# Altium PCB PCB1.PcbDoc
Units mil, origin at the board's own origin, x right, y up, seen from the top; angles counter-clockwise.
Board outline 2874.02 x 4055.12 mil, 2 copper layers (Top Layer, Bottom Layer); 31 components, 20 nets, 108 pads, 5 vias.
Unrouted connection lines stored in the file: 66.
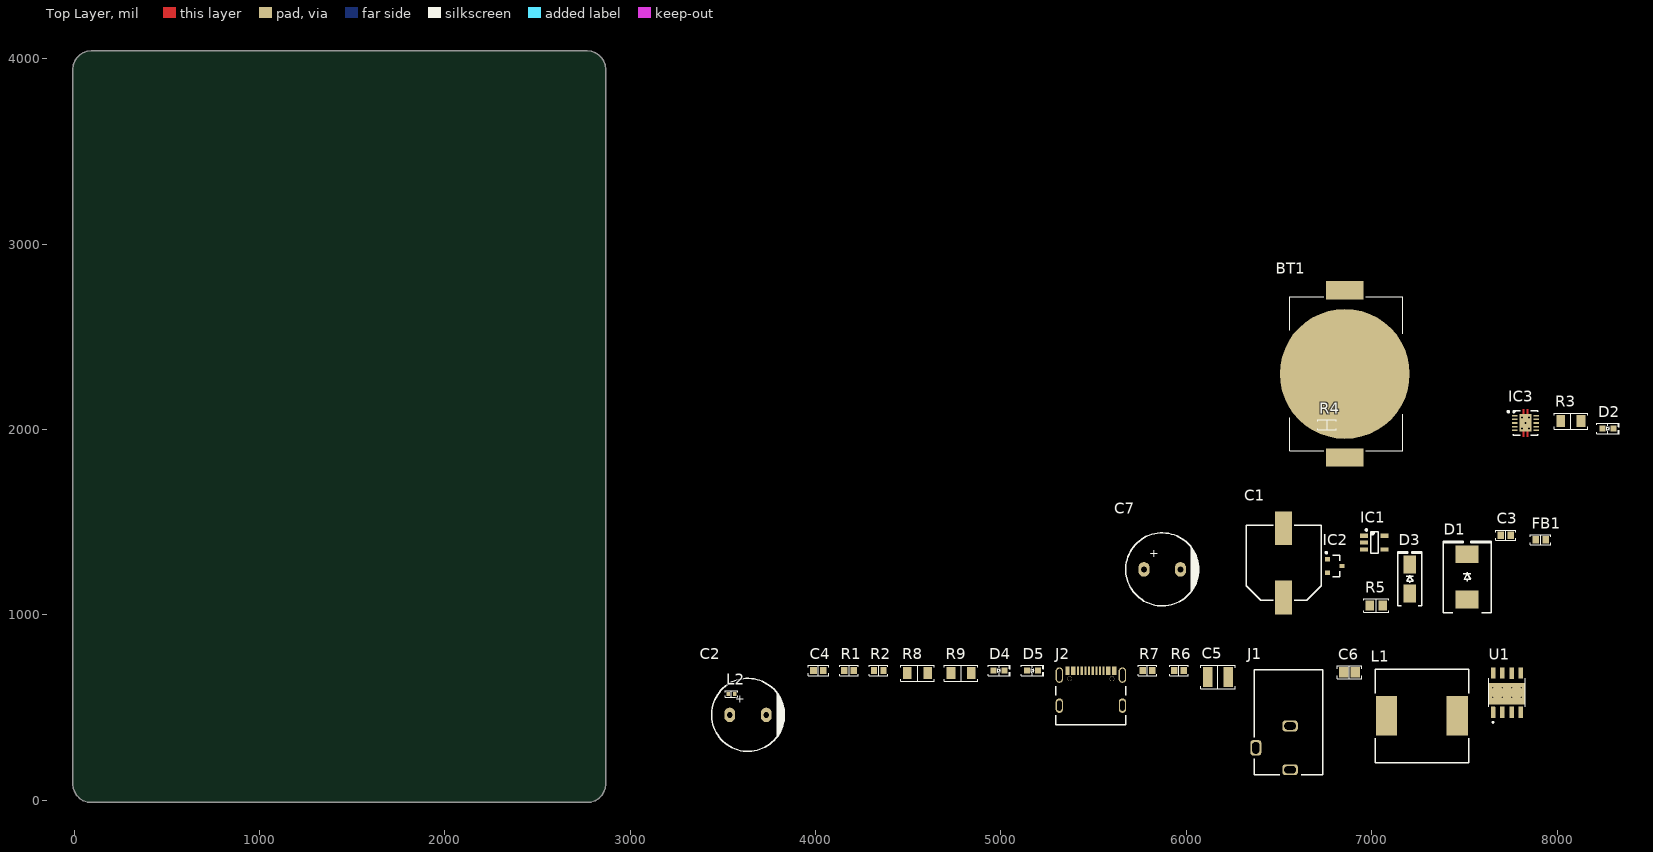
[diagram p0: Top Layer view]
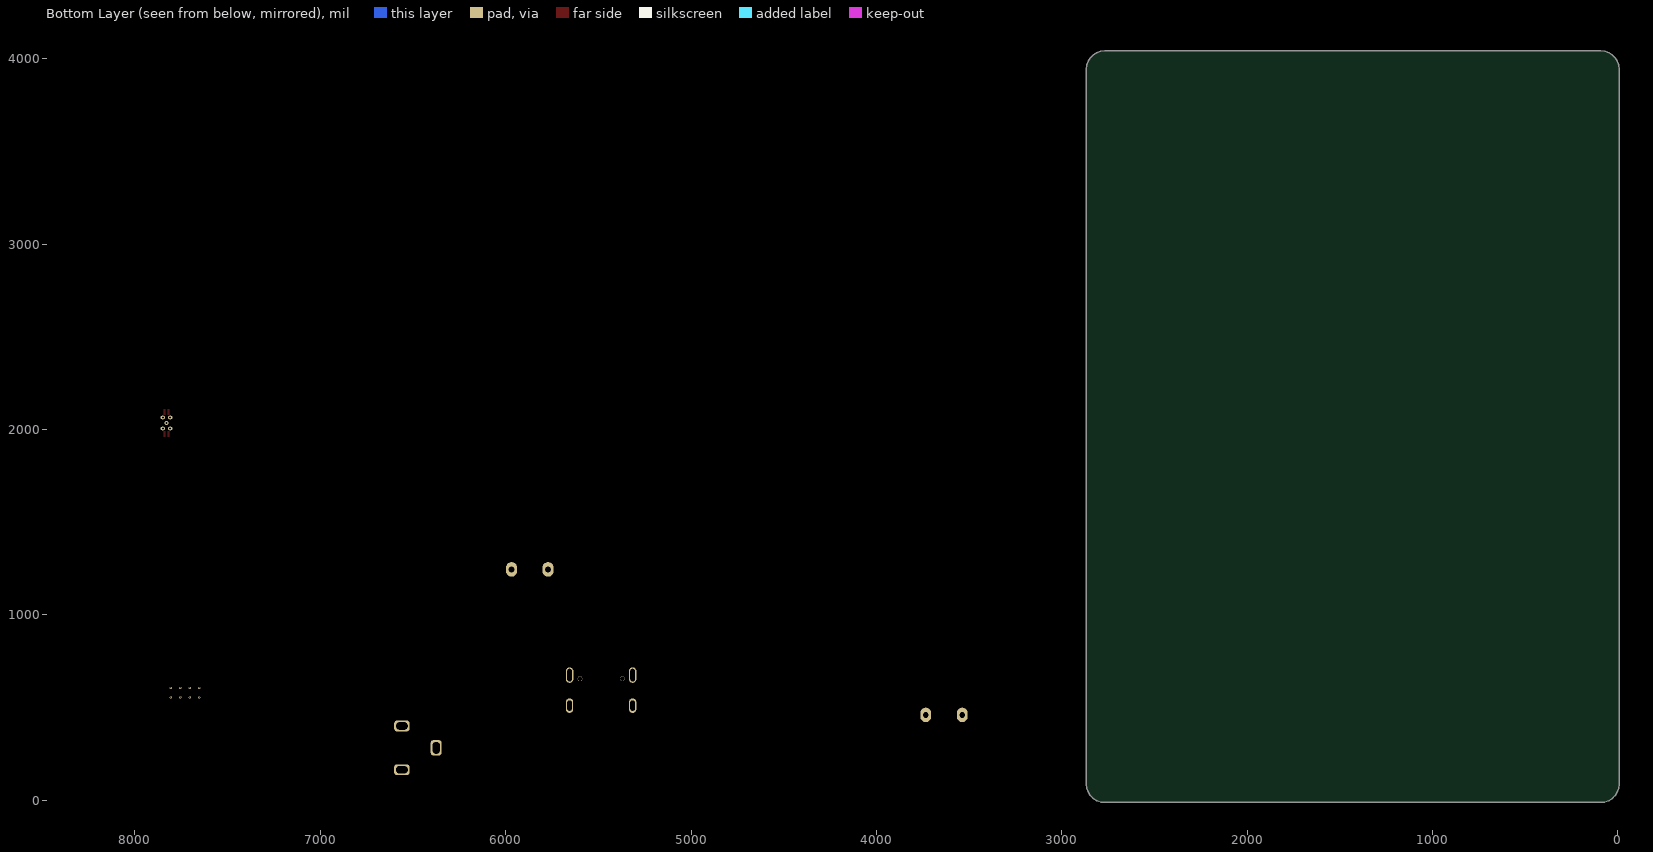
[diagram p1: Bottom Layer view, seen from below]

## Layer stack, top to bottom
Top Solder: solder mask 0.4, Solder Resist, Dk 3.5
Top Layer: signal copper 1.4
Dielectric 1: dielectric 12.6, FR-4, Dk 4.8
Bottom Layer: signal copper 1.4
Bottom Solder: solder mask 0.4, Solder Resist, Dk 3.5

## Board outline
2866.58,85.87 2866.58,3944.13 2864.11,3966.04 2856.83,3986.84 2845.1,4005.5 2829.52,4021.09 2810.86,4032.81 2790.05,4040.09 2768.15,4042.56 90.99,4042.56 69.08,4040.09 48.28,4032.81 29.62,4021.09 14.03,4005.5 2.31,3986.84 -4.97,3966.04 -7.44,3944.13 -7.44,85.87 -4.97,63.96 2.31,43.16 14.03,24.5 29.62,8.91 48.28,-2.81 69.08,-10.09 90.99,-12.56 2768.15,-12.56 2790.05,-10.09 2810.86,-2.81 2829.52,8.91 2845.1,24.5 2856.83,43.16 2864.11,63.96

## Design rules (kind name [scope] priority, off if disabled: settings)
Clearance [All] p1: gap=10 ignorepadtopadclearanceinfootprint=FALSE except(0: Arc-Hole Track-Hole SMDPad-Hole THPad-Hole Via-Hole Fill-Hole Poly-Hole Region-Hole Text-Hole)
PolygonConnect [All] p1: connectstyle=Relief reliefconductorwidth=10 reliefentries=4 polygonreliefangle="90 Angle" airgapwidth=10
RoomDefinition Schematic [InComponentClass('Schematic')] p1: confinementstyle=ConfineIn formatcopy=TRUE lockcomponents=FALSE outline 3360,95 8500,95 8500,2915 3360,2915
RoutingVias [All] p1: holewidth=28 width=50 viastyle="Through Hole" minholewidth=28 minwidth=50 maxholewidth=28 maxwidth=50
SolderMaskExpansion [All] p1: expansion=4 istentingtop=FALSE
Width [All] p1: maxlimit=10 minlimit=10 preferedwidth=10
30 further rules are at their usual default settings.

## Components (designator, comment, footprint, x,y, rotation, side; value= is the part's Value field where it differs from the comment)
BT1 "BAT-HLD-001" BAT_BAT-HLD-001 6855,2300 r90 top
C1 "100uF" "CAP ALUM 10.3MM" 6525,1280 r90 top
C2 "4.7uF" "CAP AL TH D10 L5 H14.5" 3635,460 r0 top
C3 "0.10uF" "CAP 0603/1608" 7723.43,1430 r0 top
C4 "0.10uF" "CAP 0603/1608" 4015,700 r0 top
C5 "10uF" "CAP 1210/3225 - 2.8MM" 6170,665 r0 top
C6 "10000pF" "CAP 0805/2012" 6880,690 r0 top
C7 "4.7uF" "CAP AL TH D10 L5 H14.5" 5870,1245 r0 top
D1 "1.5SMC24A" "DO214AB SMC" 7515,1205 r90 top
D2 "Red" "LED 0603/1608 RED" 8275,2005 r0 top value=Green
D3 "B320A-13-F" "DO214AC SMA" 7205.85,1193.34 r90 top
D4 "Green" "LED 0603/1608 GREEN" 4990,700 r0 top
D5 "Green" "LED 0603/1608 GREEN" 5170,700 r0 top
FB1 "28 Ohm @ 100MHz" "FER 0603/1608" 7911.57,1405 r0 top
IC1 "MCP73831T-2ATI/OT" "MICROCHIP SOT-23-5 OT" 7015,1390 r0 top
IC2 "NX2301P,215" "NXP SOT-23-3 TO-236AB" 6800.85,1263.34 r0 top
IC3 "TPS61026DRCR" "TI PVSON-10 3x3MM DRC" 7830,2035 r0 top
J1 "PJ-102AH" "CUI PJ-102AH" 6560,420 r0 top
J2 "USB-C" GCT_USB4105-GF-A 5485,510 r0 top
L1 "SRR1280-220M" "BOURNS SRR1280" 7270.94,455 r0 top value=22uH
L2 "6.8nH" "IND 0402/1005 RF WW" 3545.85,573.34 r0 top
R1 "5K1" "RES 0603/1608" 4180,700 r0 top
R2 "5K1" "RES 0603/1608" 4340,700 r0 top
R3 "280k" "RES 1206/3216" 8075,2045 r0 top
R4 "2K" "RES 0603/1608" 6760,2025 r0 top
R5 "2K" "RES 0805/2012" 7024.45,1050 r0 top
R6 "10k" "RES 0603/1608" 5960,700 r0 top
R7 "3.3k" "RES 0603/1608" 5790,700 r0 top
R8 "280k" "RES 1206/3216" 4550,685 r0 top
R9 "280k" "RES 1206/3216" 4785,685 r0 top
U1 "TPS5430" VREG_LM5017MR/NOPB 7730,580 r90 top

## Footprints (in the part's own frame and the unit in brackets; to place one, negate y for a bottom-side part, rotate by r counter-clockwise, add the part's x,y. Pads: shape width x height; smd on the part's side, far side on the other; paste and mask are expansions set on the pad)
BAT_BAT-HLD-001 [mm]
  round 17.8 smd paste-10: N1(0,0)
  rect 2.5x5.1 smd: P1(-11.45,0) P2(11.45,0)
  silkscreen extent -10.55,-7.95 10.55,7.55, body extent -11.88,-10.26 11.37,9.74, height 3.7
"BOURNS SRR1280" [mm] "Precision Wire Wound Inductor, 2-Leads, Body 12.50x12.50mm, IPC Medium Density"
  rect 2.9x5.4 smd: 1(-4.85,0) 2(4.85,0)
  silkscreen extent -6.4,-6.4 6.4,6.4, body extent -6.25,-6.25 6.25,6.25, height 7.9
"CAP 0603/1608" [mm] "Chip Capacitor, 2-Leads, Body 1.60x0.80mm, IPC Medium Density"
  rect 0.9x1 smd: 1(-0.675,0) 2(0.675,0)
  silkscreen extent -1.4,-0.7 1.4,0.7, body extent -0.8,-0.41 0.8,0.41, height 0.82
"CAP 0805/2012" [mm] "Chip Capacitor, 2-Leads, Body 2.00x1.20mm, IPC Medium Density"
  rect 1.3x1.4 smd: 1(-0.8,0) 2(0.8,0)
  silkscreen extent -1.7,-0.9 1.7,0.9, body extent -1,-0.64 1,0.64, height 1.26
"CAP 1210/3225 - 2.8MM" [mm] "Chip Capacitor, 2-Leads, Body 3.20x2.50mm, IPC Medium Density"
  rect 1.3x2.7 smd: 1(-1.4,0) 2(1.4,0)
  silkscreen extent -2.37,-1.63 2.37,1.63, body extent -1.6,-1.25 1.6,1.25, height 2.8
"CAP AL TH D10 L5 H14.5" [mm] "10MM Diameter, 5MM Lead Spacing Aluminium Capacitor"
  oval 1.5x2 hole 0.8: 1(-2.5,0) 2(2.5,0)
  silkscreen extent -5,-5 5,5, body extent -5,-5 5,5, height 14.7
"CAP ALUM 10.3MM" [mm] "Aluminum Electrolytic Capacitor, Body 10.30x10.30x10.50mm, IPC Low Density"
  rect 4.65x2.3 smd: 1(-4.75,0) 2(4.75,0)
  silkscreen extent -5.15,-5.15 5.15,5.15, body extent -5.8,-5.15 5.8,5.15, height 10.5
"CUI PJ-102AH" [mm] "DC Barrel Jack W/ Switch 2.0x5.5"
  rrect50% 2.1x1.5 hole 1 slot 1.6 at 0 deg: 1(0,-6.5) 2(0,-0.5)
  rrect50% 1.5x2.1 hole 1 slot 1.6 at 90 deg: 3(-4.7,-3.5)
  silkscreen extent -4.92,-7.2 4.47,7.2, body extent -4.92,-7.2 4.47,7.2, height 11
"DO214AB SMC" [mm] "Molded Diode, 2-Leads, Body 6.85x5.90mm, IPC Medium Density"
  rect 2.45x3.15 smd: 1(-3.1,0) 2(3.1,0)
  silkscreen extent -4.9,-3.3 4.9,3.3, body extent -3.97,-2.95 3.97,2.95, height 2.6
"DO214AC SMA" [mm] "Molded Diode, 2-Leads, Body 4.30x2.60mm, IPC Medium Density"
  rect 2.5x1.7 smd: 1(-2,0) 2(2,0)
  silkscreen extent -3.68,-1.65 3.75,1.65, body extent -2.6,-1.37 2.6,1.37, height 2.4
"FER 0603/1608" [mm] "Chip Ferrite, 2-Leads, Body 1.60x0.80mm, IPC Medium Density"
  rect 0.9x1 smd: 1(-0.675,0) 2(0.675,0)
  silkscreen extent -1.4,-0.7 1.4,0.7, body extent -0.8,-0.41 0.8,0.41, height 0.82
GCT_USB4105-GF-A [mm]
  rect 0.6x1.15 smd: A1_B12(-3.2,4.755) A4_B9(-2.4,4.755) B1_A12(3.2,4.755) B4_A9(2.4,4.755)
  rect 0.3x1.15 smd: A5(-1.25,4.755) A6(-0.25,4.755) A7(0.25,4.755) A8(1.25,4.755) B5(1.75,4.755) B6(0.75,4.755) B7(-0.75,4.755) B8(-1.75,4.755)
  oval 1.05x2.1 hole 0.6 slot 1.7 at 90 deg: S1(-4.32,4.18) S4(4.32,4.18)
  oval 1x2 hole 0.6 slot 1.4 at 90 deg: S2(-4.32,0) S3(4.32,0)
  round 0.65 hole 0.65 unplated: ""(-2.89,3.68) ""(2.89,3.68)
  silkscreen extent -4.79,-2.6 4.79,2.65, body extent -4.79,-2.6 4.79,5.11, height 3.31
"IND 0402/1005 RF WW" [mm] "Chip Inductor, 2-Leads, Body 1.00x0.50mm, IPC High Density"
  rect 0.48x0.54 smd: 1(-0.44,0) 2(0.44,0)
  silkscreen extent -0.87,-0.45 0.87,0.45, body extent -0.5,-0.29 0.5,0.29, height 0.51
"LED 0603/1608 GREEN" [mm] "Chip Diode, 2-Leads, Body 1.60x0.80mm, IPC Medium Density"
  rect 0.8x0.8 smd: 1(-0.75,0) 2(0.75,0)
  silkscreen extent -1.52,-0.7 1.52,0.7, body extent -0.8,-0.4 0.8,0.4, height 0.53
"LED 0603/1608 RED" [mm] "Chip Diode, 2-Leads, Body 1.60x0.80mm, IPC Medium Density"
  rect 0.8x0.8 smd: 1(-0.75,0) 2(0.75,0)
  silkscreen extent -1.52,-0.7 1.52,0.7, body extent -0.8,-0.4 0.8,0.4, height 0.53
"MICROCHIP SOT-23-5 OT" [mm] "SOT23, 5-Leads, Body 2.90x2.70mm, Pitch 0.95mm, IPC Medium Density"
  rect 1.1x0.6 smd: 1(-1.4,0.95) 2(-1.4,0) 3(-1.4,-0.95) 4(1.4,-0.95) 5(1.4,0.95)
  silkscreen extent -1.22,-1.5 0.5,1.85, body extent -1.36,-1.45 1.36,1.45, height 1.19
"NXP SOT-23-3 TO-236AB" [mm] "SOT23, 3-Leads, Body 2.90x2.40mm, Pitch 0.95mm, IPC Medium Density"
  rect 0.7x0.6 smd: 1(-1,0.95) 2(1,0) 3(-1,-0.95)
  silkscreen extent -1.27,-1.5 0.7,1.95, body extent -1.16,-1.45 1.16,1.45, height 1.5
"RES 0603/1608" [mm] "Chip Resistor, 2-Leads, Body 1.60x0.80mm, IPC Medium Density"
  rect 0.85x0.95 smd: 1(-0.65,0) 2(0.65,0)
  silkscreen extent -1.27,-0.7 1.27,0.7, body extent -0.8,-0.4 0.8,0.4, height 0.45
"RES 0805/2012" [mm] "Chip Resistor, 2-Leads, Body 2.00x1.25mm, IPC Medium Density"
  rect 1.15x1.35 smd: 1(-0.875,0) 2(0.875,0)
  silkscreen extent -1.7,-0.9 1.7,0.9, body extent -0.95,-0.62 1.05,0.63, height 0.6
"RES 1206/3216" [mm] "Chip Resistor, 2-Leads, Body 3.13x1.55mm, IPC Medium Density"
  rect 1.2x1.65 smd: 1(-1.4,0) 2(1.4,0)
  silkscreen extent -2.3,-1.1 2.3,1.1, body extent -1.57,-0.8 1.62,0.8, height 0.6
"TI PVSON-10 3x3MM DRC" [mm] "PVSON, 10-Leads, Body 3.00x3.00mm, Pitch 0.50mm, Thermal Pad 1.65x2.40mm, IPC Medium Density"
  oval 0.8x0.23 smd: 1(-1.475,1) 2(-1.475,0.5) 3(-1.475,0) 4(-1.475,-0.5) 5(-1.475,-1) 6(1.475,-1) 7(1.475,-0.5) 8(1.475,0) 9(1.475,0.5) 10(1.475,1)
  rect 1.65x2.4 smd paste-5: 11(0,0)
  Top Layer region: 0.11,1.1 0.39,1.1 0.39,1.9 0.11,1.9
  Top Layer region: -0.11,1.9 -0.39,1.9 -0.39,1.1 -0.11,1.1
  Top Layer region: -0.11,-1.1 -0.39,-1.1 -0.39,-1.9 -0.11,-1.9
  Top Layer region: 0.11,-1.9 0.39,-1.9 0.39,-1.1 0.11,-1.1
  silkscreen extent -2.47,-1.7 1.7,1.7, body extent -1.55,-1.55 1.55,1.55, height 1
VREG_LM5017MR/NOPB [mm]
  rrect5% 1.55x0.6 smd mask+0: 1(-2.7,1.905) 2(-2.7,0.635) 3(-2.667,-0.635) 4(-2.7,-1.905) 5(2.7,-1.905) 6(2.667,-0.635) 7(2.7,0.635) 8(2.7,1.905)
  rect 2.95x4.9 smd paste-3 mask+0: 9(-0.127,0)
  round 0.3 hole 0.2: 10(-0.65,1.95) 11(0.65,1.95) 12(-0.65,0.65) 13(0.65,0.65) 14(-0.65,-0.65) 15(0.65,-0.65) 16(-0.65,-1.95) 17(0.65,-1.95)
  silkscreen extent -4.17,-2.52 1.95,2.52, body extent -3.13,-2.45 2.87,2.45, height 1.7

## Part data
BT1: "Battery Retainer Coin, 20.0mm 1 Cell SMD (SMT) Tab", Package=None, Availability=Unavailable, MP=BAT-HLD-001, Price=None
C1: library part EEE-1HA101P, "CAP ALUM 100UF 20% 50V SMD", Device Package="Radial, Can - SMD", Lifetime @ Temp="2000 Hrs @ 85C", Manufacturer="Panasonic Electronic Components", Ripple Current=250mA, Supplier Part Number 1=PCE3916TR-ND, TemperatureRange="-40C ~ 85C", Tolerance=20%, Voltage=50V, ComponentLink1Description=Datasheet, ComponentLink1URL=http://media.digikey.com/pdf/Data%20Sheets/Panasonic%20Electronic%20Components/S_Series_Type_V.pdf, ComponentLink2Description="Digi-Key listing", ComponentLink2URL=http://digikey.com/product-detail/en/EEE-1HA101P/PCE3916TR-ND/766083, Impedance=-, Part Number=EEE-1HA101P, PartId=7398, Price=0.3144, Supplier 1=Digi-Key, Type=Automotive
C2 C7: library part UPM2C4R7MPD1TD, "CAP ALUM 4.7UF 20% 160V RADIAL", Device Package="Radial, Can, 10mm", Manufacturer=Nichicon, Ripple Current="57mA @ 120Hz", Supplier Part Number 1=493-5313-3-ND, TemperatureRange="-40C ~ 105C", Tolerance=20%, Voltage=160V, ComponentLink1Description=Datasheet, ComponentLink1URL=http://nichicon-us.com/english/products/pdfs/e-upm.pdf, ComponentLink2Description="Digi-Key Listing", ComponentLink2URL=https://www.digikey.com/product-detail/en/nichicon/UPM2C4R7MPD1TD/493-5313-3-ND/3130318, Part Number=UPM2C4R7MPD1TD, PartId=24632, Price=0.2252, Supplier 1=Digi-Key, Type=Polar
C3 C4: library part C0603C104J3RACTU, "CAP CER 0.1UF 25V X7R 0603", Device Package="0603 (1608 Metric)", Manufacturer=Kemet, Supplier Part Number 1=399-1282-2-ND, TemperatureCoefficient=X7R, TemperatureRange="-55C ~ 125C", Tolerance=5%, Voltage=25V, ComponentLink1Description=Datasheet, ComponentLink1URL=http://www.kemet.com/docfinder?Partnumber=C0603C104J3RACTU, ComponentLink2Description="Digi-Key Listing", ComponentLink2URL=https://www.digikey.com/product-detail/en/kemet/C0603C104J3RACTU/399-1282-2-ND/416045, Part Number=C0603C104J3RACTU, PartId=13224, Price=0.0714, Supplier 1=Digi-Key
C5: library part 12105C106KAT2A, "CAP CER 10UF 50V X7R 1210", Device Package="1210 (3225 Metric)", Manufacturer="AVX Corporation", Supplier Part Number 1=478-9912-2-ND, TemperatureCoefficient=X7R, TemperatureRange="-55C ~ 125C", Tolerance=10%, Voltage=50V, ComponentLink1Description=Datasheet, ComponentLink1URL=http://datasheets.avx.com/X7RDielectric.pdf, ComponentLink2Description="Digi-Key Listing", ComponentLink2URL=https://www.digikey.com/product-detail/en/avx-corporation/12105C106KAT2A/478-9912-2-ND/6006191, Part Number=12105C106KAT2A, PartId=19201, Price=0.2813, Supplier 1=Digi-Key
C6: library part C0805C103K5RACAUTO, "CAP CER 10000PF 50V X7R 0805", Device Package="0805 (2012 Metric)", Manufacturer=Kemet, Supplier Part Number 1=399-6924-2-ND, TemperatureCoefficient=X7R, TemperatureRange="-55C ~ 125C", Tolerance=10%, Voltage=50V, ComponentLink1Description=Datasheet, ComponentLink1URL=http://www.kemet.com/docfinder?Partnumber=C0805C103K5RACAUTO, ComponentLink2Description="Digi-Key Listing", ComponentLink2URL=https://www.digikey.com/product-detail/en/kemet/C0805C103K5RACAUTO/399-6924-2-ND/3314918, Part Number=C0805C103K5RACAUTO, PartId=14086, Price=0.0167, Supplier 1=Digi-Key
D1: "TVS DIODE 20.5V 33.2V DO214AB", Current - Peak Pulse (10/1000µs)=45.8A, Manufacturer="Littelfuse Inc.", Operating Temperature="-55°C ~ 150°C (TJ)", Package / Case="DO-214AB, SMC", Power - Peak Pulse="1500W (1.5kW)", Power Line Protection=No, Supplier Device Package="DO-214AB (SMCJ)", Supplier Part Number 1=1.5SMC24ACT-ND, Voltage - Breakdown (Min)=22.8V, Voltage - Clamping (Max) @ Ipp=33.2V, Voltage - Reverse Standoff (Typ)=20.5V, Applications="General Purpose", ComponentLink1Description=Datasheet, ComponentLink1URL=https://www.littelfuse.com/~/media/electronics/datasheets/tvs_diodes/littelfuse_tvs_diode_1_5smc_datasheet.pdf.pdf, ComponentLink2Description="DigiKey Link", ComponentLink2URL=http://digikey.com/product-detail/en/littelfuse-inc/1.5SMC24A/1.5SMC24ACT-ND/1835386, LastUpdated="9/2/2020 1:20:00 AM", Lifecycle Status=Active, Minimum Order=1, Mounting Type="Surface Mount", Packaging=TapeAndReel, Part Number=1.5SMC24A, Part Status=Active, PartId=6399, Price=0.18, Series=1.5SMC, Supplier 1=DigiKey, Type=Zener, Unidirectional Channels=1
D2: library part "LS Q976-NR-1", "LED RED DIFFUSED 0603 SMD", Current (Test)=20mA, Device Package="0603 (1608 Metric)", Manufacturer="OSRAM Opto Semiconductors Inc.", Supplier Part Number 1=475-2512-2-ND, Voltage Forward=2V, Colour=Red, ComponentLink1Description=Datasheet, ComponentLink1URL=http://www.osram-os.com/Graphics/XPic9/00128792_0.pdf, ComponentLink2Description="Digi-Key Listing", ComponentLink2URL=http://www.digikey.ca/product-detail/en/LS%20Q976-NR-1/475-2512-2-ND/1227986, Lens Transparency=Diffused, Millicandela=104mcd, Part Number="LS Q976-NR-1", PartId=7063, Price=0.0654, Supplier 1=Digi-Key, Type="Surface Mount", Viewing Angle=160
D3: "DIODE SCHOTTKY 20V 3A SMA", Current Rectified=3A, Current Reverse Leakage @ Vr="500uA @ 20V", Device Package="DO-214AC, SMA", Junction Operating Temperature="-55C ~ 150C", Manufacturer="Diodes Incorporated", Supplier Part Number 1=B320A-FDITR-ND, Voltage DC Reverse (Vr)=20V, Voltage Forward (Vf)="500mV @ 3A", ComponentLink1Description=Datasheet, ComponentLink1URL=http://www.diodes.com/_files/datasheets/ds30891.pdf, ComponentLink2Description="Digi-Key Listing", ComponentLink2URL=https://www.digikey.com/product-detail/en/diodes-incorporated/B320A-13-F/B320A-FDITR-ND/717692, Part Number=B320A-13-F, PartId=16342, Price=0.1348, Supplier 1=Digi-Key, Type=Schottky
D4 D5: library part HSMQ-C191, "LED GREEN DIFFUSED 0603 SMD", Current (Test)=20mA, Device Package="0603 (1608 Metric)", Manufacturer="Avago Technologies US Inc.", Supplier Part Number 1=516-1807-2-ND, Voltage Forward=3.4V, Colour=Green, ComponentLink1Description=Datasheet, ComponentLink1URL=http://www.avagotech.com/docs/AV02-0977EN, ComponentLink2Description="Digi-Key Listing", ComponentLink2URL=http://www.digikey.ca/product-detail/en/HSMQ-C191/516-1807-2-ND/1012398, Lens Transparency=Diffused, Millicandela=145mcd, Part Number=HSMQ-C191, PartId=7059, Price=0.4769, Supplier 1=Digi-Key, Type="Surface Mount", Viewing Angle=140
FB1: library part 742792603, "FERRITE CHIP 28 OHM 4.0A 0603", Current Rating=4A, DC Resistance="30 mOhm Max", Device Package="0603 (1608 Metric)", Manufacturer="Wurth Electronics Inc", Supplier Part Number 1=732-1590-2-ND, ComponentLink1Description=Datasheet, ComponentLink1URL=http://katalog.we-online.de/pbs/datasheet/742792603.pdf, ComponentLink2Description="Digi-Key listing", ComponentLink2URL=http://digikey.com/product-detail/en/742792603/732-1590-2-ND/1638994, Part Number=742792603, PartId=6745, Price=0.1829, Supplier 1=Digi-Key, Type="Differential Mode - Single"
IC1: "IC CONTROLLR LI-ION 4.2V SOT23-5", Device Package="SC-74A, SOT-753", Manufacturer="Microchip Technology", Operating Temperature="-40C ~ 85C", Supplier Part Number 1=MCP73831T-2ATI/OTTR-ND, Voltage Supply="3.75 V ~ 6 V", Battery Chemistry="Li-Ion, Li-Pol", ComponentLink1Description=Datasheet, ComponentLink1URL=http://www.microchip.com/mymicrochip/filehandler.aspx?ddocname=en026002, ComponentLink2Description="Digi-Key Listing", ComponentLink2URL=http://www.digikey.com/product-detail/en/microchip-technology/MCP73831T-2ATI%2FOT/MCP73831T-2ATI%2FOTTR-ND/964303, Function="Charge Management", Part Number=MCP73831T-2ATI/OT, PartId=9704, Price=0.42, Series=-, Supplier 1=Digi-Key
IC2: "MOSFET P-CH 20V 2A TO-236AB", Current Continuous Drain="2A (Ta)", Device Package="TO-236-3, SC-59, SOT-23-3", Drain to Source Voltage (Vdss)=20V, Input Capacitance (Ciss) at Vds="380pF @ 6V", Manufacturer="NXP Semiconductors", Power - Max=400mW, Supplier Part Number 1=568-10314-2-ND, ComponentLink1Description=Datasheet, ComponentLink1URL=http://www.nxp.com/documents/data_sheet/NX2301P.pdf, ComponentLink2Description="Digi-Key Listing", ComponentLink2URL=http://www.digikey.com/product-detail/en/NX2301P,215/568-10314-2-ND/2779960, Features=Standard, Gate Charge (Qg)="6nC @ 4.5V", Part Number=NX2301P,215, PartId=8179, Price=0.072, Rds On (Max) at Id, Vgs="120 mOhm @ 1A, 4.5V", Supplier 1=Digi-Key, Type="MOSFET P-Channel, Metal Oxide", Vgs(th) (Max) at Id="1.1V @ 250uA"
IC3: "IC REG BOOST 5V 1.5A SYNC 10SON", Current Output="1.5A (Switch)", Device Package="10-VFDFN Exposed Pad", Frequency - Switching=600kHz, Manufacturer="Texas Instruments", Operating Temperature="-40C ~ 85C (TA)", Supplier Part Number 1=TPS61026DRCR-ND, Voltage - Input (Max)=5.5V, ComponentLink1Description=Datasheet, ComponentLink1URL=http://www.ti.com/lit/ds/symlink/tps61020.pdf, ComponentLink2Description="Digi-Key Listing", ComponentLink2URL=https://www.digikey.com/product-detail/en/TPS61026DRCR/TPS61026DRCR-ND/1672116, Function=Step-Up, Number Of Outputs=1, Output Configuration=Positive, Output Type=Fixed, Part Number=TPS61026DRCR, PartId=9353, Price=0.9562, Series=-, Supplier 1=Digi-Key
J1: "CONN PWR JACK 2X5.5MM SOLDER", Current Rating (Amps)=5A, Manufacturer="CUI Devices", Material Flammability Rating="UL94 V-0", Supplier Part Number 1=CP-102AH-ND, Voltage - Rated=24VDC, Actual Diameter="0.079\" (2.00mm ID), 0.256\" (6.50mm OD)", ComponentLink1Description=Datasheet, ComponentLink1URL=https://www.cuidevices.com/product/resource/digikeypdf/pj-102ah.pdf, ComponentLink2Description="DigiKey Link", ComponentLink2URL=//digikey.com/product-detail/en/cui-devices/PJ-102AH/CP-102AH-ND/408448, Connector Type=Jack, Gender=Male, Industry Recognized Mating Diameter="2.00mm ID (0.079\"), 5.50mm OD (0.217\")", Internal Switch(s)="Single Switch, Normally Closed", LastUpdated="12/16/2019 7:01:27 PM", Lifecycle Status=0, Mating Length/Depth="0.354\" (9.00mm)", Minimum Order=1, Mounting Type="Through Hole, Right Angle", Number of Positions/Contacts="2 Conductors, 3 Contacts", Packaging=Tray, Part Number=PJ-102AH, Part Status=Active, Price=0.76, Series=-, Shielding=Unshielded, Supplier 1=DigiKey, Termination=Solder
J2: library part USB4105-GF-A, "USB-C (USB TYPE-C) USB 2.0 Receptacle Connector 24 (16+8 Dummy) Position Surface Mount, Right Angle; Through Hole", Package=None, Availability=Unavailable, MP=USB4105-GF-A, Price=None
L1: "FIXED IND 22UH 4.3A 38.6 MOHM", Current - Saturation=4.1A, Current Rating=4.3A, DC Resistance (DCR)="38.6 mOhm Max", Device Package=Nonstandard, Frequency - Self Resonant=11MHz, Inductance=22uH, Manufacturer="Bourns Inc.", Operating Temperature="-40C ~ 125C", Q @ Freq="20 @ 2.52MHz", Supplier Part Number 1=SRR1280-220MTR-ND, Tolerance=20%, ComponentLink1Description=Datasheet, ComponentLink1URL=http://www.bourns.com/docs/Product-Datasheets/SRR1280.pdf, ComponentLink2Description="Digi-Key Listing", ComponentLink2URL=https://www.digikey.com/product-detail/en/bourns-inc/SRR1280-220M/SRR1280-220MTR-ND/1969996, Material - Core=Ferrite, Part Number=SRR1280-220M, PartId=15714, Price=0.7737, Series=SRR1280, Shielding=Shielded, Supplier 1=Digi-Key, Type=Wirewound
L2: library part LQW15AN6N8G00D, "FIXED IND 6.8NH 700MA 90 MOHM", DC Resistance="90 mOhm Max", Device Package="0402 (1005 Metric)", Manufacturer="Murata Electronics North America", Q at Frequency="25 @ 250MHz", Supplier Part Number 1=490-6840-2-ND, TemperatureRange="-55C ~ 125C", Tolerance=2%, ComponentLink1Description=Datasheet, ComponentLink1URL=http://search.murata.co.jp/Ceramy/image/img/PDF/ENG/L0075S0080LQW15A_00.pdf, ComponentLink2Description="Digi-Key listing", ComponentLink2URL=http://digikey.com/product-detail/en/LQW15AN6N8G00D/490-6840-2-ND/2594949, Part Number=LQW15AN6N8G00D, PartId=6426, Price=0.0807, Shielding=Unshielded, Supplier 1=Digi-Key, Type=Wirewound
R1 R2: library part 0603S8J0512, "RES SMD 5K1 OHM 5% 1/8W 0603", Device Package="1608 (0603 Metric)", Manufacturer=Uniohm, PowerRating="0.125W, 1/8W", TemperatureCoefficient=100ppm/C, TemperatureRange="-55C ~ 155C", Tolerance=5%, Part Number=0603S8J0512, Price=0.0089
R3 R8 R9: library part ERA-8AEB2803V, "RES SMD 280K OHM 0.1% 1/4W 1206", Device Package="1206 (3216 Metric)", Manufacturer="Panasonic Electronic Components", PowerRating="0.25W, 1/4W", Supplier Part Number 1=P280KBCTR-ND, TemperatureCoefficient=25ppm/C, TemperatureRange="-55C ~ 155C", Tolerance=0.1%, ComponentLink1Description=Datasheet, ComponentLink1URL=http://industrial.panasonic.com/lecs/www-data/pdf/AOA0000/AOA0000CE26.pdf, ComponentLink2Description="Digi-Key listing", ComponentLink2URL=http://digikey.com/product-detail/en/ERA-8AEB2803V/P280KBCTR-ND/3070936, Part Number=ERA-8AEB2803V, PartId=3611, Price=0.1954, Supplier 1=Digi-Key, Type="Thin Film"
R4: library part 0603S8J0202, "RES SMD 2K OHM 5% 1/8W 0603", Device Package="1608 (0603 Metric)", Manufacturer=Uniohm, PowerRating="0.125W, 1/8W", TemperatureCoefficient=100ppm/C, TemperatureRange="-55C ~ 155C", Tolerance=5%, Part Number=0603S8J0202, Price=0.0089
R5: library part 0805S8J0202, "RES SMD 2K OHM 5% 1/8W 0805", Device Package="2012 (0805 Metric)", Manufacturer=Uniohm, PowerRating="0.125W, 1/8W", TemperatureCoefficient=100ppm/C, TemperatureRange="-55C ~ 155C", Tolerance=5%, Part Number=0805S8J0202, Price=0.0089
R6: library part ERA-3AEB103V, "RES SMD 10K OHM 0.1% 1/10W 0603", Device Package="0603 (1608 Metric)", Manufacturer="Panasonic Electronic Components", PowerRating="0.1W, 1/10W", Supplier Part Number 1=P10KDBTR-ND, TemperatureCoefficient=25ppm/C, TemperatureRange="-55C ~ 155C", Tolerance=0.1%, ComponentLink1Description=Datasheet, ComponentLink1URL=http://industrial.panasonic.com/lecs/www-data/pdf/AOA0000/AOA0000CE26.pdf, ComponentLink2Description="Digi-Key listing", ComponentLink2URL=http://digikey.com/product-detail/en/ERA-3AEB103V/P10KDBTR-ND/1465878, Part Number=ERA-3AEB103V, PartId=1432, Price=0.055, Supplier 1=Digi-Key, Type="Thin Film"
R7: library part ERA-3APB332V, "RES SMD 3.3K OHM 0.1% 1/10W 0603", Device Package="0603 (1608 Metric)", Manufacturer="Panasonic Electronic Components", PowerRating="0.1W, 1/10W", Supplier Part Number 1=P3.3KAYTR-ND, TemperatureCoefficient=15ppm/C, TemperatureRange="-55C ~ 155C", Tolerance=0.1%, ComponentLink1Description=Datasheet, ComponentLink1URL=http://industrial.panasonic.com/lecs/www-data/pdf/AOA0000/AOA0000CE26.pdf, ComponentLink2Description="Digi-Key listing", ComponentLink2URL=http://digikey.com/product-detail/en/ERA-3APB332V/P3.3KAYTR-ND/3070646, Part Number=ERA-3APB332V, PartId=1857, Price=0.2873, Supplier 1=Digi-Key, Type="Thin Film"
U1: library part TPS5430DDA, "CONVERTER 5.5V-36 to 5.5V", Package="HSOIC-8 Texas Instruments", Availability=Unavailable, DigiKey-Purchase-URL=https://snapeda.com/shop?store=DigiKey&id=226174, MF="Texas Instruments", Mouser-Purchase-URL=https://snapeda.com/shop?store=Mouser&id=226174, MP=TPS5430DDA, Price=None, SnapEDA_Link=https://www.snapeda.com/parts/TPS5430DDA/Texas%20Instruments/view-part/226174/?ref=snap, Texas_Instruments-Purchase-URL=https://snapeda.com/shop?store=Texas+Instruments&id=226174

## Via types
v1: diameter 23.62, hole 11.81, Top Layer to Bottom Layer, 5 vias

## Nets (pads, with @x,y where several pads share a name; then routed paths per layer and width w, separated by ;. In a path a pad name is that pad's centre, name@x,y a point inside that pad or via, vN(x,y) a via of type N, cw(c..) or ccw(c..) an arc to the next point about the centre after c; other vN are vias at no path point)
5V: D3.2 D4.1 D5.1 L1.2 R6.2
D+: J2.A6 J2.B6
D-: J2.A7 J2.B7
GND: BT1.N1 C1.2 C2.2 C3.1 C4.1 C5.2 C7.2 D1.1 IC1.2 IC3.5 IC3.10 IC3.11 J1.2 J1.3 J2.A1_B12 J2.B1_A12 J2.S1 J2.S2 J2.S3 J2.S4 R1.1 R2.1 R4.1 R5.1 R7.1 R8.2 R9.2 U1.6 U1.9
  other v1: 7810.32,2005.47 7849.69,2005.47 7830,2035 7810.32,2064.53 7849.69,2064.53
NetBT1_P1: BT1.P1 BT1.P2 C7.1 IC1.3 IC2.3
NetC1_1: C1.1 C3.2 C5.1 D1.2 FB1.2 U1.7
NetC2_1: C2.1 C4.2 D2.1 D3.1 IC1.4 IC2.1 J2.A4_B9 J2.B4_A9 R5.2
NetC6_1: C6.1 U1.1
NetC6_2: C6.2 L1.1 U1.8
NetD2_2: D2.2 R3.1
NetD4_2: D4.2 R8.1
NetD5_2: D5.2 R9.1
NetFB1_1: FB1.1 J1.1
NetIC1_1: IC1.1 R3.2
NetIC1_5: IC1.5 R4.2
NetIC3_1: IC3.1 IC3.6 L2.2
NetIC3_9: IC3.9 L2.1
NetJ2_A5: J2.A5 R2.2
NetJ2_B5: J2.B5 R1.2
NetR6_1: R6.1 R7.2 U1.4
pads on no net: IC2.2 IC3.2 IC3.3 IC3.4 IC3.7 IC3.8 J2. J2.A8 J2.B8 U1.2 U1.3 U1.5 U1.10 U1.11 U1.12 U1.13 U1.14 U1.15 U1.16 U1.17

## Silkscreen, mask and mechanical layers (free items; w line width, h text height)
Mechanical 1:
  the board outline again, w8

## Text inside footprints (layer, text, board x,y; h text height)
C2: Top Overlay "+" at 3566.1,509.21 h78.74
C7: Top Overlay "+" at 5801.1,1294.21 h78.74